# Altium PCB JTAGHub.PcbDoc
Units mm, origin at the board's own origin, x right, y up, seen from the top; angles counter-clockwise.
Board outline 58 x 40 mm, 2 copper layers (Top Layer, Bottom Layer); 5 components, 9 nets, 64 pads, 2 vias.
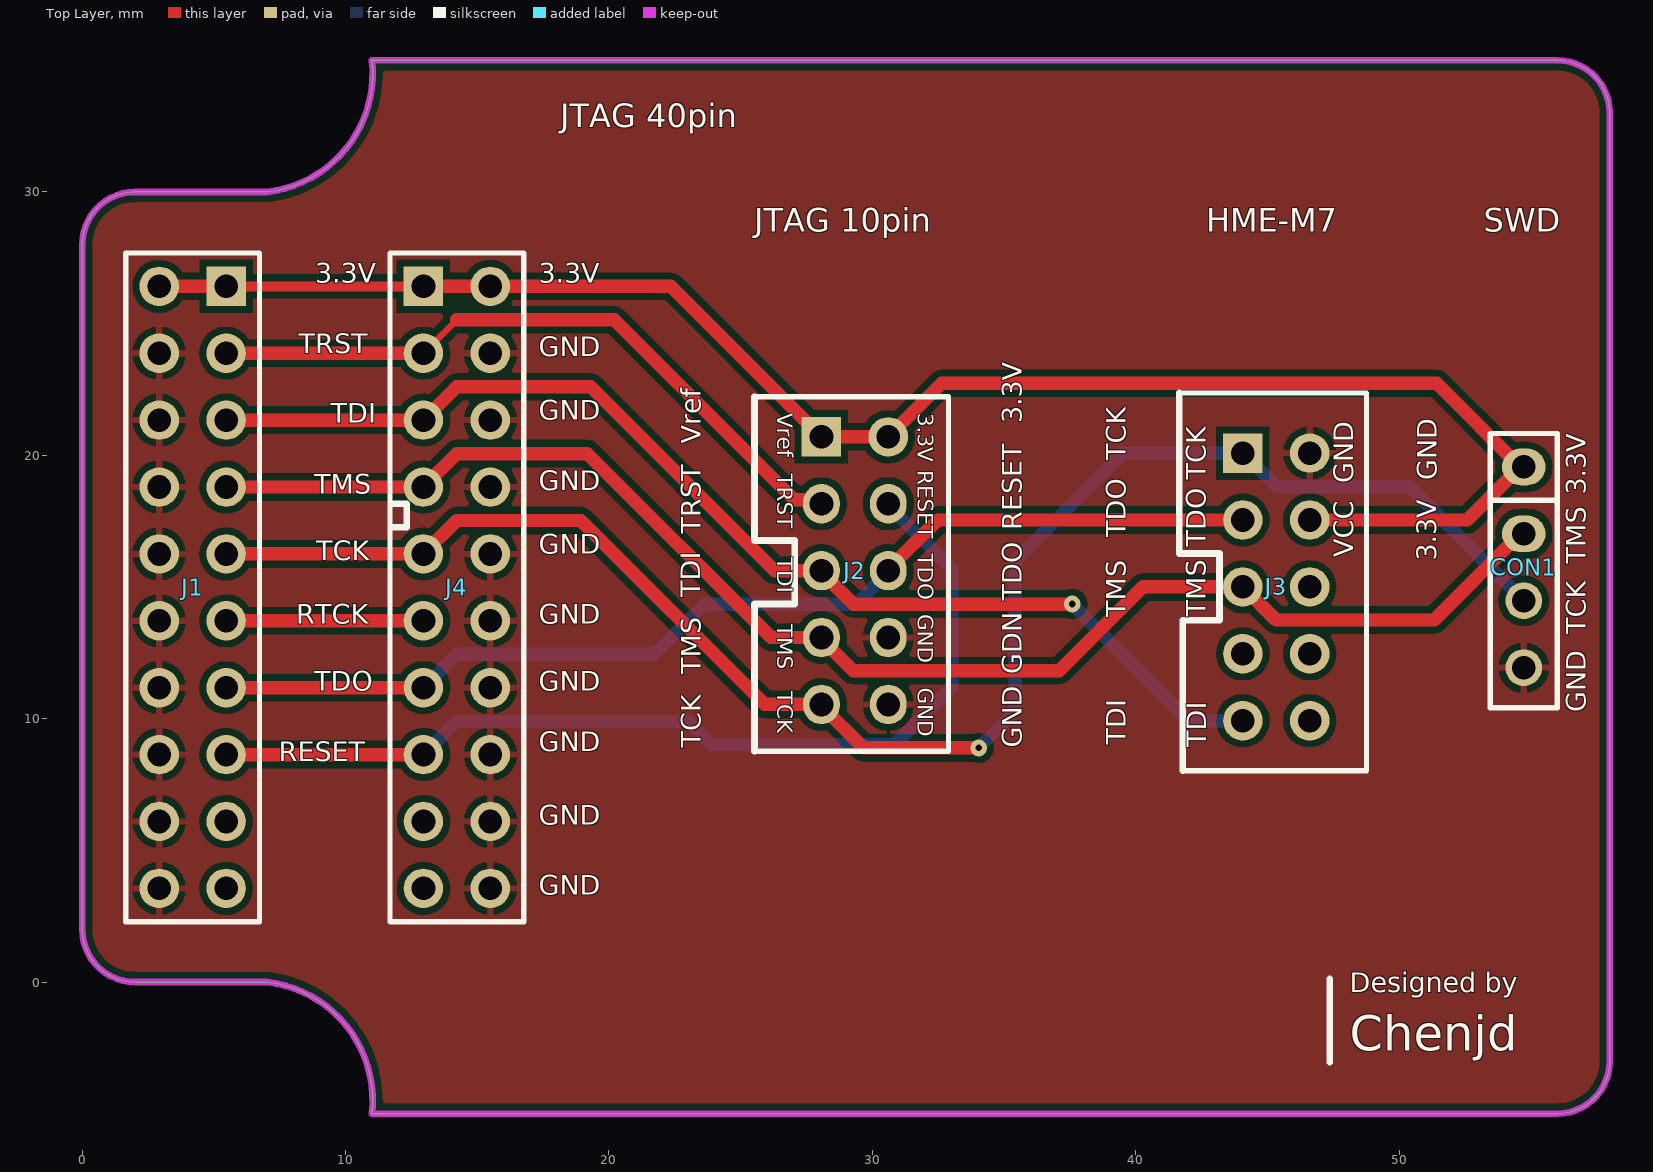
[diagram p0: Top Layer view]
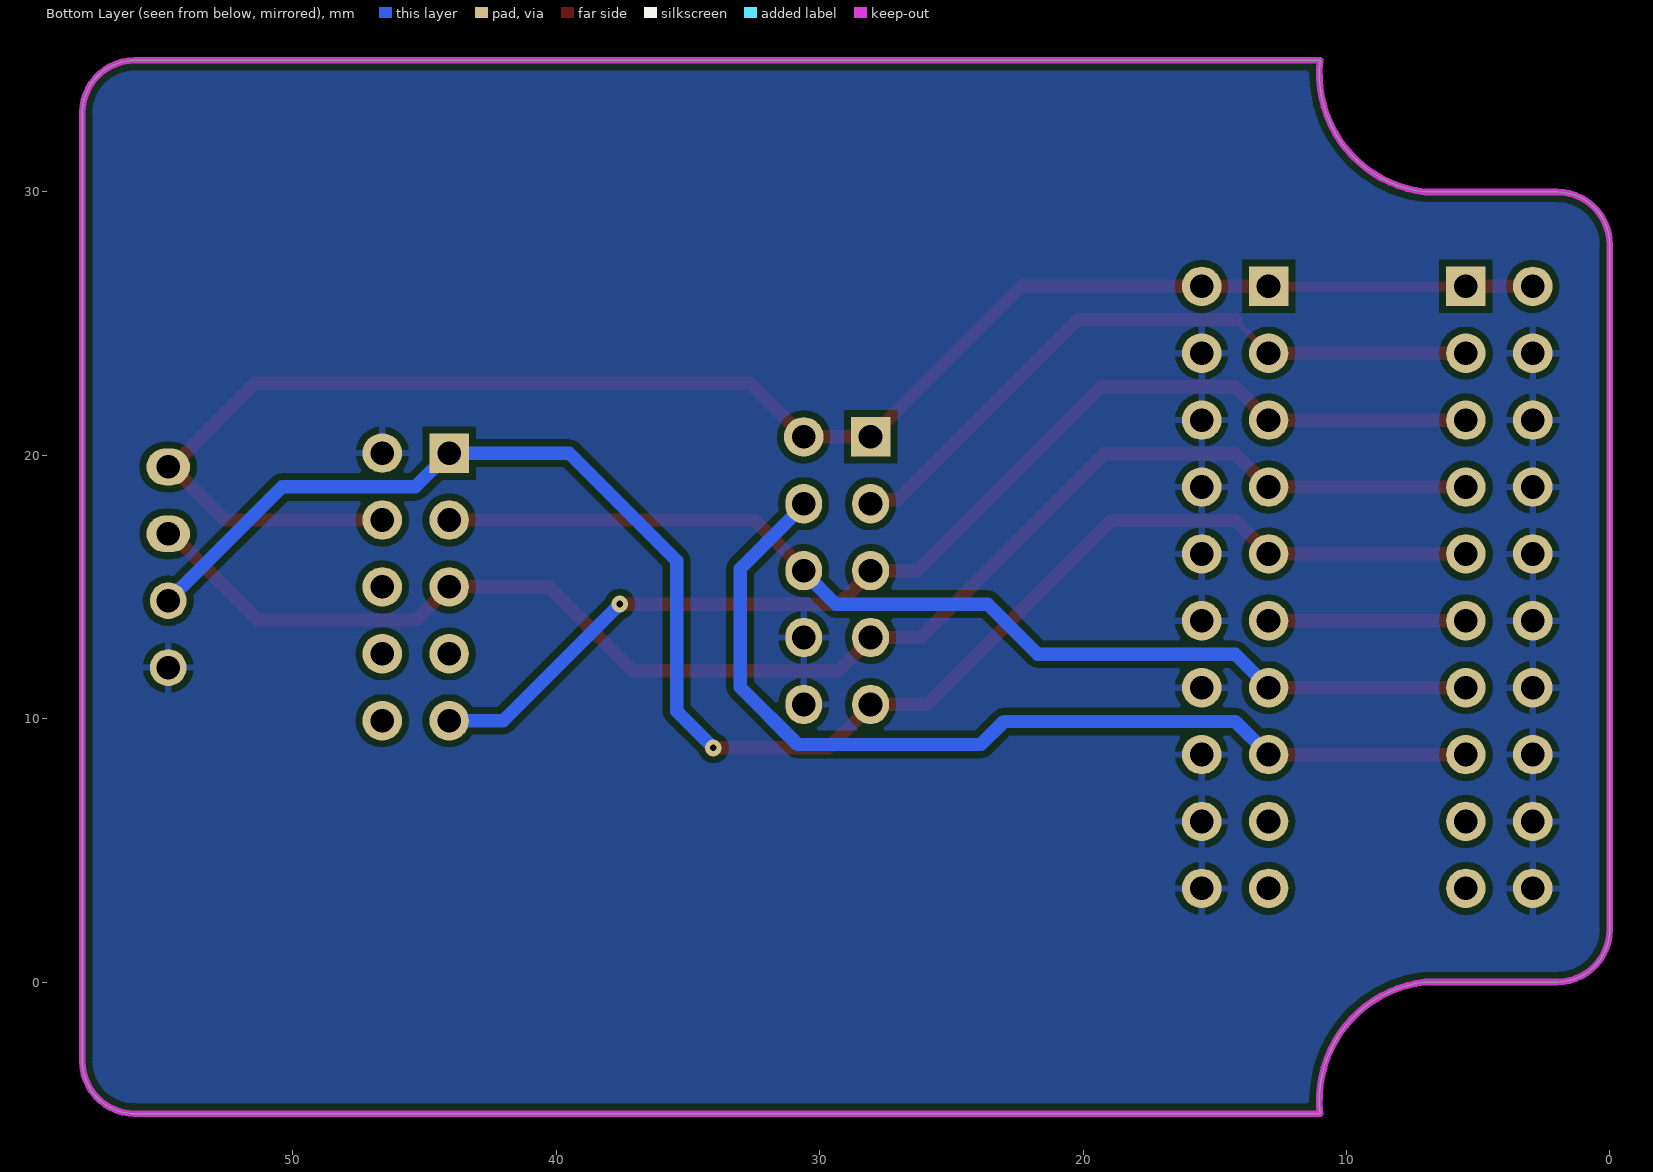
[diagram p1: Bottom Layer view, seen from below]

## Layer stack, top to bottom
Top Solder: solder mask 0.0102, Solder Resist, Dk 3.5
Top Layer: signal copper 0.0356
Dielectric 1: dielectric 0.32, FR-4, Dk 4.8
Bottom Layer: signal copper 0.0356
Bottom Solder: solder mask 0.0102, Solder Resist, Dk 3.5

## Board outline
2,0 7,0 cw(c6.5,-4.5) 11,-5 56,-5 ccw(c56,-3) 58,-3 58,33 ccw(c56,33) 56,35 11,35 cw(c6.5,34.5) 7,30 2,30 ccw(c2,28) 0,28 0,2 ccw(c2,2)

## Design rules (kind name [scope] priority, off if disabled: settings)
Clearance [All] p1: gap=0.254 ignorepadtopadclearanceinfootprint=FALSE except(0: Arc-Hole Track-Hole SMDPad-Hole THPad-Hole Via-Hole Fill-Hole Poly-Hole Region-Hole Text-Hole)
PolygonConnect [All] p1: connectstyle=Relief reliefconductorwidth=0.254 reliefentries=4 polygonreliefangle="90 Angle" airgapwidth=0.254
RoutingVias [All] p1: holewidth=0.711 width=1.27 viastyle="Through Hole" minholewidth=0.711 minwidth=1.27 maxholewidth=0.711 maxwidth=1.27
SolderMaskExpansion [All] p1: expansion=0.102 istentingtop=FALSE
Width [All] p1: maxlimit=0.508 minlimit=0.254 preferedwidth=0.254
30 further rules are at their usual default settings.

## Components (designator, comment, footprint, x,y, rotation, side; value= is the part's Value field where it differs from the comment)
CON1 "JLINK-SWD" Jlink-SWD 54.737,19.558 r270 top
J1 "Female HDR2X10" "Fe-HDR2X10/2.54-S - duplicate" 2.921,26.416 r270 top
J2 "JTAG-10P" JTAG-10pin 28.067,20.701 r270 top
J3 "Pin HDR2X5" "PIN HDR2X5/2.54MM-S - DUPLICATE" 45.339,9.162 r90 top
J4 "Female HDR2X10" Fe-HDR2X10/2.54-S 12.954,26.416 r270 top

## Footprints (in the part's own frame and the unit in brackets; to place one, negate y for a bottom-side part, rotate by r counter-clockwise, add the part's x,y. Pads: shape width x height; smd on the part's side, far side on the other; paste and mask are expansions set on the pad)
Fe-HDR2X10/2.54-S [mm] "Connector; Header; 10x2 Position"
  rect 1.5x1.5 hole 0.9: 1(0,0)
  round 1.5 hole 0.9: 2(0,2.54) 3(2.54,0) 4(2.54,2.54) 5(5.08,0) 6(5.08,2.54) 7(7.62,0) 8(7.62,2.54) 9(10.16,0) 10(10.16,2.54) 11(12.7,0) 12(12.7,2.54) 13(15.24,0) 14(15.24,2.54) 15(17.78,0) 16(17.78,2.54) 17(20.32,0) 18(20.32,2.54) 19(22.86,0) 20(22.86,2.54)
  silkscreen extent -1.27,-1.27 24.13,3.81, body extent -1.39,-1.23 24.26,3.77, height 8.5
"Fe-HDR2X10/2.54-S - duplicate" [mm] "Connector; Header; 10x2 Position"
  rect 1.5x1.5 hole 0.9: 1(0,2.54)
  round 1.5 hole 0.9: 2(0,0) 3(2.54,2.54) 4(2.54,0) 5(5.08,2.54) 6(5.08,0) 7(7.62,2.54) 8(7.62,0) 9(10.16,2.54) 10(10.16,0) 11(12.7,2.54) 12(12.7,0) 13(15.24,2.54) 14(15.24,0) 15(17.78,2.54) 16(17.78,0) 17(20.32,2.54) 18(20.32,0) 19(22.86,2.54) 20(22.86,0)
  silkscreen extent -1.27,-1.27 24.13,3.81, body extent -1.39,-1.23 24.26,3.77, height 8.5
Jlink-SWD [mil] "Jlink下载接口"
  oval 55x65 hole 35: 1(0,0) 2(100,0)
  round 55 hole 35: 3(200,0) 4(300,0)
  silkscreen extent -50,-50 360,50, body extent -45,-55 355,45, height 453
JTAG-10pin [mm] "10pin JTAG"
  rect 1.5x1.5 hole 0.9: 1(0,0)
  round 1.5 hole 0.9: 2(0,2.54)
  oval 1.5x1.397 hole 0.9: 3(2.54,0) 4(2.54,2.54) 5(5.08,0) 6(5.08,2.54) 7(7.62,0) 8(7.62,2.54) 9(10.16,0) 10(10.16,2.54)
  silkscreen extent -1.52,-2.54 11.94,4.83, body extent -5.07,-2.98 15.23,5.87, height 9.13
"PIN HDR2X5/2.54MM-S - DUPLICATE" [mm] "Connector; Header; 5x2 Position"
  rect 1.5x1.5 hole 0.9: 1(10.922,1.27)
  round 1.5 hole 0.9: 2(10.922,-1.27) 3(8.382,1.27) 4(8.382,-1.27) 5(5.842,1.27) 6(5.842,-1.27) 7(3.302,1.27) 8(3.302,-1.27) 9(0.762,1.27) 10(0.762,-1.27)
  silkscreen extent -1.14,-3.43 13.21,3.68, body extent -0.51,-2.54 12.19,2.54, height 7.58

## Part data
CON1: "SWD下载接口"
J2: "10pin JTAG"

## Via types
v1: diameter 0.635, hole 0.254, Top Layer to Bottom Layer, tented both sides, 2 vias

## Nets (pads, with @x,y where several pads share a name; then routed paths per layer and width w, separated by ;. In a path a pad name is that pad's centre, name@x,y a point inside that pad or via, vN(x,y) a via of type N, cw(c..) or ccw(c..) an arc to the next point about the centre after c; other vN are vias at no path point)
GND: CON1.4 J1.4 J1.6 J1.8 J1.10 J1.12 J1.14 J1.16 J1.18 J1.20 J2.8 J2.10 J3.2 J4.4 J4.6 J4.8 J4.10 J4.12 J4.14 J4.16 J4.18 J4.20
RESTE: J1.15 J2.4 J4.15 | length 37.3
  Top Layer w0.508: J1.15 J4.15
  Bottom Layer w0.508: J4.15 14.212,9.894 22.999,9.894 23.876,9.017 30.841,9.017 33.02,11.196 33.02,15.696 30.607,18.109 J2.4
RTCK: J1.11 J4.11 | length 7.5
  Top Layer w0.508: J1.11 J4.11
TCLK: CON1.3 J1.9 J2.9 J3.1 J4.9 | length 63.7
  Top Layer w0.508: J1.9 J4.9 14.224,17.526 18.923,17.526 25.908,10.541 J2.9 28.067,10.489 29.666,8.89 v1(34.036,8.89)
  Bottom Layer w0.508: v1(34.036,8.89) 35.433,10.287 35.433,16.002 39.515,20.084 J3.1 45.351,18.802 50.413,18.802 CON1.3
TDI: J1.5 J2.5 J3.9 J4.5 | length 44.4
  Top Layer w0.508: J1.5 J4.5 14.224,22.606 19.304,22.606 26.289,15.621 J2.5 28.067,15.569 29.285,14.351 v1(37.592,14.351)
  Bottom Layer w0.508: v1(37.592,14.351) 42.019,9.924 J3.9
TDO: J1.13 J2.6 J3.3 J4.13 | length 41.3
  Top Layer w0.508: J1.13 J4.13 ; J2.6 30.607,15.673 32.478,17.544 J3.3
  Bottom Layer w0.508: J4.13 14.224,12.446 21.717,12.446 23.622,14.351 29.389,14.351 30.607,15.569 J2.6
TMS: CON1.2 J1.7 J2.7 J3.5 J4.7 | length 56.4
  Top Layer w0.508: J1.7 J4.7 14.224,20.066 19.177,20.066 26.162,13.081 J2.7 28.067,13.029 29.273,11.823 37.096,11.823 40.277,15.004 J3.5 45.327,13.746 51.338,13.746 54.61,17.018 CON1.2
TRST: J1.3 J2.3 J4.3 | length 26
  Top Layer w0.254: J4.3 14.224,25.146 ; J2.3@27.918,18.31 J2.3
  Top Layer w0.508: J1.3 J4.3 ; 14.224,25.146 20.193,25.146 27.029,18.31 J2.3@27.918,18.31
VCC: CON1.1 J1.1 J1.2 J2.1 J2.2 J3.4 J4.1 J4.2 | length 65.2
  Top Layer w0.381: J1.1 J4.1
  Top Layer w0.508: J1.2 J1.1 ; J4.1 J4.2 22.352,26.416 J2.1 J2.2 32.639,22.733 51.435,22.733 CON1.1@54.61,19.558 ; J3.4 52.596,17.544 CON1.1@54.61,19.558 ; CON1.1 CON1.1@54.61,19.558
pads on no net: J1.17 J1.19 J3.6 J3.7 J3.8 J3.10 J4.17 J4.19

## Polygon pours and split planes (outlines as drawn)
GND on Top Layer "GND_L01_P000" (solid, remove dead copper, pour order 0): -0.046,-5.461 58.039,-5.461 58.039,35.56 0.301,35.56
no net on Bottom Layer "NONET_L02_P002" (solid, remove dead copper, pour order 2): 0.762,30.353
GND on Bottom Layer "GND_L02_P001" (solid, remove dead copper, pour order 1): -0.02,-4.826 57.912,-4.826 57.912,34.925 0.148,34.925

## Keep-outs
Keep-Out Layer:
  the board outline again, w0.254

## Silkscreen, mask and mechanical layers (free items; w line width, h text height)
Top Overlay:
  lines w0.254: 11.811,17.272 12.319,17.272 12.319,18.161 11.811,18.161 ; 47.371,-3.048 47.371,0.127
  text "JTAG 40pin" at 18.158,32.148 h1.52
  text "HME-M7" at 42.672,28.194 h1.52
  text "JTAG 10pin" at 25.524,28.177 h1.52
  text "SWD" at 53.213,28.177 h1.52
  text "3.3V" at 8.847,26.303 h1.27
  text "3.3V" at 17.333,26.303 h1.27
  text "TRST" at 8.212,23.636 h1.27
  text "GND" at 17.333,23.508 h1.27
  text "3.3V" at 35.927,21.209 h1.27 r90
  text "GND" at 17.333,21.095 h1.27
  text "TDI" at 9.426,20.983 h1.27
  text "Vref" at 23.735,20.448 h1.27 r90
  text "TCK" at 39.864,19.812 h1.27 r90
  text "GND" at 51.675,19.05 h1.27 r90
  text "3.3V" at 57.339,18.501 h1.27 r90
  text "GND" at 17.333,18.428 h1.27
  text "TMS" at 8.816,18.302 h1.27
  text "RESET" at 35.927,17.145 h1.27 r90
  text "TRST" at 23.735,17.018 h1.27 r90
  text "TDO" at 39.864,16.891 h1.27 r90
  text "GND" at 17.333,16.015 h1.27
  text "3.3V" at 51.664,16.002 h1.27 r90
  text "TMS" at 57.339,15.875 h1.27 r90
  text "TCK" at 8.885,15.762 h1.27
  text "TDI" at 23.721,14.605 h1.27 r90
  text "TDO" at 35.927,14.478 h1.27 r90
  text "TMS" at 39.864,13.843 h1.27 r90
  text "RTCK" at 8.128,13.349 h1.27
  text "GND" at 17.333,13.348 h1.27
  text "TCK" at 57.339,13.208 h1.27 r90
  text "TMS" at 23.735,11.684 h1.27 r90
  text "GDN" at 35.927,11.684 h1.27 r90
  text "TDO" at 8.807,10.809 h1.27
  text "GND" at 17.333,10.808 h1.27
  text "GND" at 57.339,10.246 h1.27 r90
  text "TDI" at 39.878,9.017 h1.27 r90
  text "TCK" at 23.735,8.89 h1.27 r90
  text "GND" at 35.927,8.89 h1.27 r90
  text "GND" at 17.333,8.522 h1.27
  text "RESET" at 7.454,8.142 h1.27
  text "GND" at 17.333,5.728 h1.27
  text "GND" at 17.333,3.061 h1.27
  text "Designed by" at 48.133,-0.635 h1.27
  text "Chenjd" at 48.133,-3.048 h2.29

## Text inside footprints (layer, text, board x,y; h text height)
J2: Top Overlay "Vref" at 26.173,21.589 h1.02 r270; Top Overlay "3.3V" at 31.516,21.59 h1.02 r270; Top Overlay "TRST" at 26.173,19.304 h1.02 r270; Top Overlay "RESET" at 31.507,19.431 h1.02 r270; Top Overlay "TDO" at 31.507,16.256 h1.02 r270; Top Overlay "TDI" at 26.185,16.129 h1.02 r270; Top Overlay "GND" at 31.507,13.97 h1.02 r270; Top Overlay "GND" at 31.507,11.176 h1.02 r270; Top Overlay "TMS" at 26.173,13.589 h1.02 r270; Top Overlay "TCK" at 26.173,11.049 h1.02 r270
J3: Top Overlay "VCC" at 48.5,16.13 h1.27 r90; Top Overlay "GND" at 48.5,18.941 h1.27 r90; Top Overlay "TDI" at 42.926,8.908 h1.27 r90; Top Overlay "TMS" at 42.912,13.861 h1.27 r90; Top Overlay "TDO" at 42.912,16.528 h1.27 r90; Top Overlay "TCK" at 42.912,19.068 h1.27 r90